# Allegro board usm-p2.brd
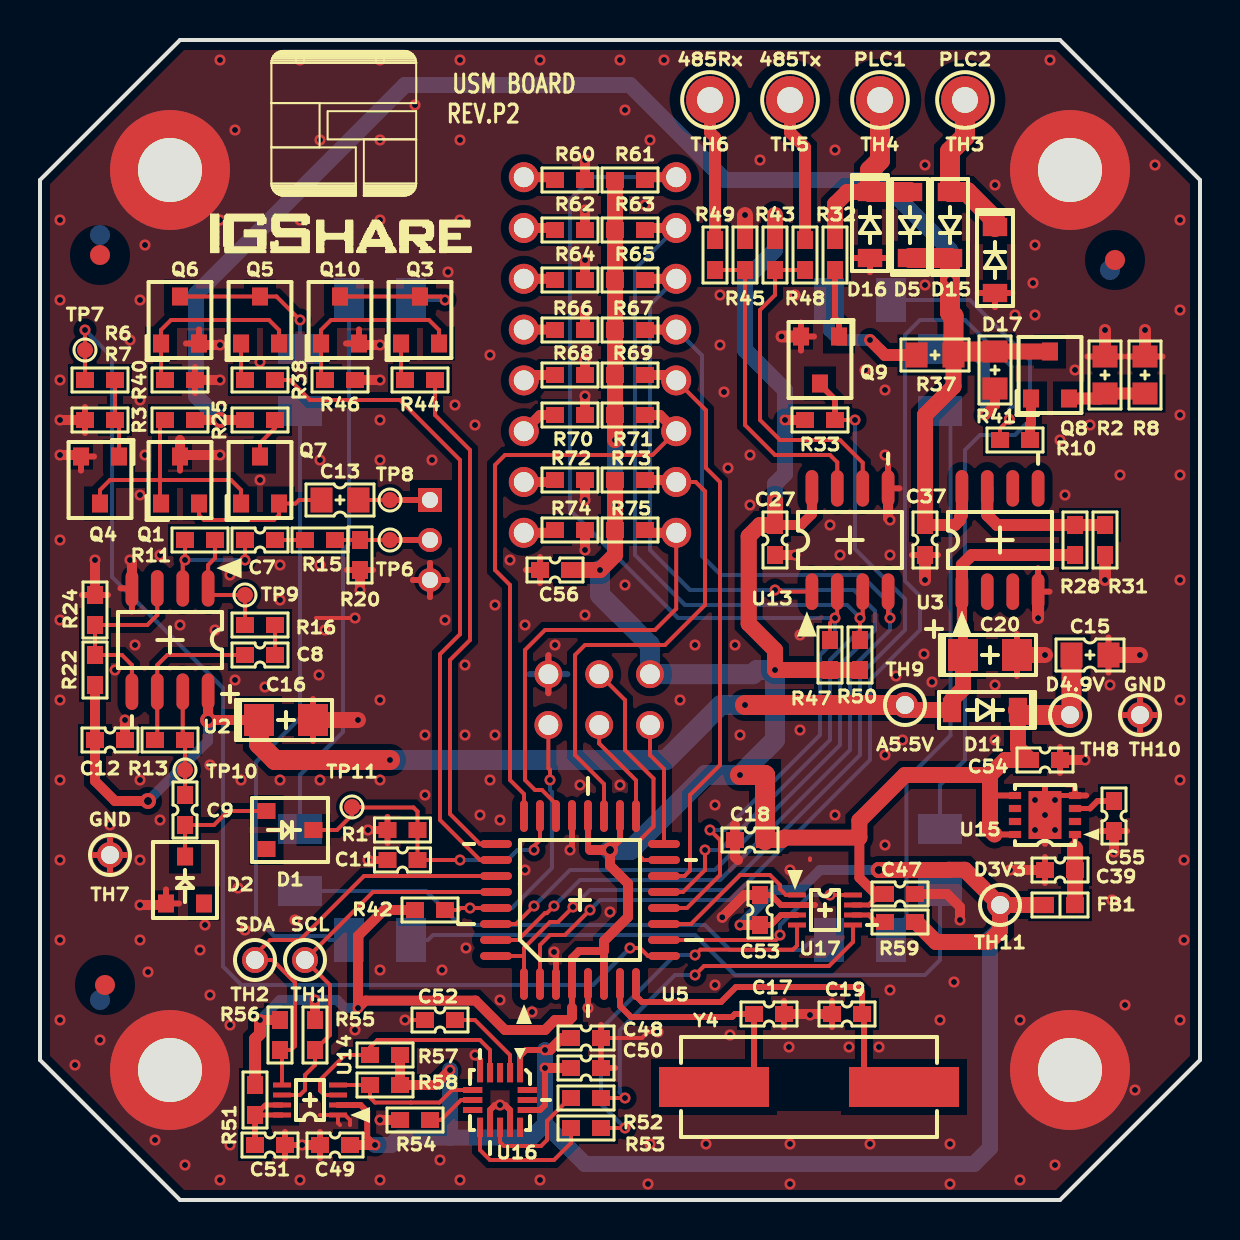
[diagram p0: board, top side]
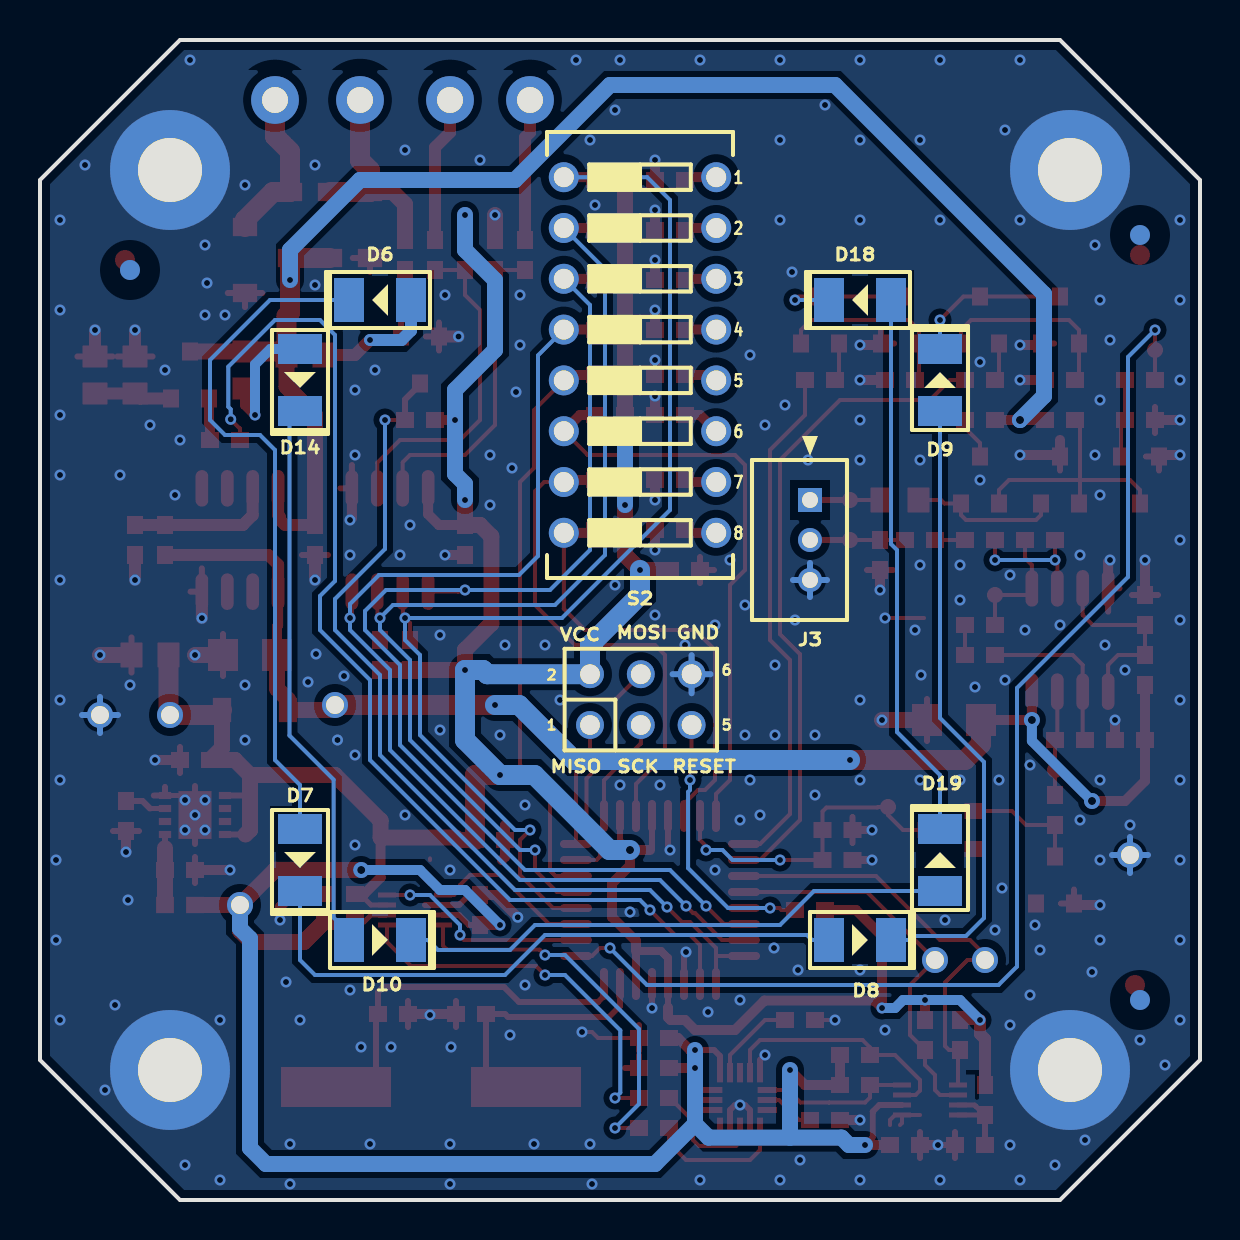
[diagram p1: board, bottom side, seen from below]

Outline 58 x 58 mm; copper layers: TOP, BOTTOM. Coordinates in mm from the lower left corner of the outline.
Outline path: 0,51 7,58 51,58 58,51 58,7 51,0 7,0 0,7 0,51

## Placement (name value [footprint] x y rotation side)
C7  200pF  [CC1608]  11 33 0 top
C8  680pF  [CC1608]  11 27.25 0 top
C9  1nF  [CC1608]  7.25 19.5 90 top
C11  560pF  [CC1608]  18.12 17 0 top
C12  100nF  [CC1608]  3.5 23 180 top
C13  47nF  [CC2012]  15 35 180 top
C15  2.2uF  [CC2012]  52.5 27.25 180 top
C16  TCSCS1C685MAAR  [TC3216]  12.3 24 0 top
C17  15pF  [CC1608]  36.45 9.3 0 top
C18  100nF  [CC1608]  35.5 18 0 top
C19  15pF  [CC1608]  40.35 9.3 180 top
C20  TCSCS1C685MAAR  [TC3216]  47.5 27.25 0 top
C27  100nF  [CC1608]  36.75 33 90 top
C37  680nF  [CC1608]  44.25 33 90 top
C39  2.2uF  [CC1608]  51 16.5 180 top
C47  100nF  [CC1608]  43 15.3 0 top
C48  100nF  [CC1608]  27.3 8.1 0 top
C49  100nF  [CC1608]  14.75 2.75 180 top
C50  4.7uF  [CC1608]  27.3 6.6 0 top
C51  2.2uF  [CC1608]  11.5 2.75 0 top
C52  100nF  [CC1608]  20 9 180 top
C53  100nF  [CC1608]  36 14.5 90 top
C54  100nF  [CC1608]  50.25 22 0 top
C55  100nF  [CC1608]  53.7 19.2 270 top
C56  100nF  [CC1608]  25.75 31.5 0 top
D1  -  [BAT54]  12.5 18.5 270 top
D2  -  [BAT54]  7.25 16 0 top
D5  MMSD4148T1G  [SOD-123]  43.5 48.75 270 top
D6  JSL_3528URC  [JSL-3528_ALT]  41 45 0 bottom
D7  JSL_3528URC  [JSL-3528_ALT]  45 17 270 bottom
D8  JSL_3528URC  [JSL-3528_ALT]  17 13 180 bottom
D9  JSL_3528URC  [JSL-3528_ALT]  13 41 90 bottom
D10  JSL_3528PGC  [JSL-3528_ALT]  41 13 180 bottom
D11  MMSD4148T1G  [SOD-123]  47.25 24.5 0 top
D14  JSL_3528PGC  [JSL-3528_ALT]  45 41 270 bottom
D15  MMSD4148T1G  [SOD-123]  45.5 48.75 270 top
D16  MMSD4148T1G  [SOD-123]  41.5 48.75 90 top
D17  MMSD4148T1G  [SOD-123]  47.75 47 90 top
D18  JSL_3528PGC  [JSL-3528_ALT]  17 45 0 bottom
D19  JSL_3528PGC  [JSL-3528_ALT]  13 17 90 bottom
FB1  BLM18HE152SN1  [BEAD1608]  51 14.75 180 top
H1  PCB_HOLE  [HOLE3_2]  6.5 51.5 0 top
H2  PCB_HOLE  [HOLE3_2]  51.5 51.5 0 top
H3  PCB_HOLE  [HOLE3_2]  6.5 6.5 0 top
H4  PCB_HOLE  [HOLE3_2]  51.5 6.5 0 top
J2  2.54mm_Header_2*3  [HEADER2X3_2_54MM]  30.5 23.75 180 bottom
J3  -  [A2001-WV03]  19.5 33 90 bottom
NOREF  -  []  80.6 -2.2 0 top
NOREF#2  -  []  0 0 0 top
NOREF#3  -  [unnamed#2]  53.75 47 0 top
NOREF#4  -  []  72 -25.8 0 top
NOREF#5  -  []  0 7 0 top
NOREF#6  -  []  7 0 90 top
NOREF#7  -  [unnamed#2]  3.25 10.75 0 top
NOREF#8  -  [unnamed#2]  3 47.25 0 top
NOREF#9  -  [unnamed#2]  3 48.25 180 bottom
NOREF#10  -  [unnamed#2]  3 10 180 bottom
NOREF#11  -  [unnamed#2]  53.5 46.5 180 bottom
Q1  MMBT3906  [SOT23]  7 36 0 top
Q3  MMBT3904  [SOT23]  19 44 0 top
Q4  MMBT3904  [SOT23]  3 36 180 top
Q5  MMBT3904  [SOT23]  11 44 0 top
Q6  MMBT3904  [SOT23]  7 44 0 top
Q7  MMBT3904  [SOT23]  11 36 0 top
Q8  BCV27  [SOT23]  50.5 41.25 0 top
Q9  MMBT3904  [SOT23]  39 42 180 top
Q10  MMBT3904  [SOT23]  15 44 0 top
R1  510K  [RC1608]  18.12 18.5 0 top
R2  15  [RC2012]  53.25 41.25 270 top
R3  47K  [RC1608]  7 39 0 top
R6  10K  [RC1608]  3 41 0 top
R7  10K  [RC1608]  3 39 0 top
R8  15  [RC2012]  55.25 41.25 270 top
R10  1K  [RC1608]  48.75 38 180 top
R11  1M  [RC1608]  8 33 0 top
R13  1M  [RC1608]  6.5 23 0 top
R15  10K  [RC1608]  14 33 180 top
R16  10K  [RC1608]  11 28.75 0 top
R20  100K  [RC1608]  16 32.25 90 top
R22  10K  [RC1608]  2.75 26.5 90 top
R24  10K  [RC1608]  2.75 29.5 270 top
R25  200  [RC1608]  11 39 180 top
R28  360K  [RC1608]  51.75 33 270 top
R31  100K  [RC1608]  53.25 33 90 top
R32  100K  [RC1608]  39.75 47.25 270 top
R33  47K  [RC1608]  39 39 180 top
R37  1K  [RC2012]  44.75 42.25 0 top
R38  2.7K  [RC1608]  11 41 180 top
R40  3K  [RC1608]  7 41 180 top
R41  1K  [RC2012]  47.75 41.5 90 top
R42  10K  [RC1608]  19.5 14.5 180 top
R43  4.7K  [RC1608]  36.75 47.25 90 top
R44  2.7K  [RC1608]  19 41 180 top
R45  4.7K  [RC1608]  35.25 47.25 270 top
R46  3K  [RC1608]  15 41 180 top
R47  4.7K  [RC1608]  39.5 27.25 270 top
R48  10  [RC1608]  38.25 47.25 270 top
R49  10  [RC1608]  33.75 47.25 270 top
R50  4.7K  [RC1608]  41 27.25 270 top
R51  200K  [RC1608]  10.75 5 90 top
R52  0  [RC1608]  27.3 5.1 180 top
R53  0  [RC1608]  27.3 3.6 180 top
R54  4.7K  [RC1608]  18.75 4 0 top
R55  4.7K  [RC1608]  13.75 8.25 90 top
R56  4.7K  [RC1608]  12 8.25 90 top
R57  4.7K  [RC1608]  17.25 7.25 0 top
R58  4.7K  [RC1608]  17.25 5.75 0 top
R59  4.7K  [RC1608]  43 13.9 0 top
R60  1K  [RC1608]  26.5 51 180 top
R61  4.7K  [RC1608]  29.5 51 180 top
R62  1K  [RC1608]  26.5 48.5 180 top
R63  4.7K  [RC1608]  29.5 48.5 180 top
R64  1K  [RC1608]  26.5 46 180 top
R65  4.7K  [RC1608]  29.5 46 180 top
R66  1K  [RC1608]  26.5 43.5 180 top
R67  4.7K  [RC1608]  29.5 43.5 180 top
R68  1K  [RC1608]  26.5 41.25 180 top
R69  4.7K  [RC1608]  29.5 41.25 180 top
R70  1K  [RC1608]  26.5 39.25 180 top
R71  4.7K  [RC1608]  29.5 39.25 180 top
R72  1K  [RC1608]  26.5 36 180 top
R73  4.7K  [RC1608]  29.5 36 180 top
R74  1K  [RC1608]  26.5 33.5 180 top
R75  4.7K  [RC1608]  29.5 33.5 180 top
S2  -  [LL1051-1-8]  28 42.25 270 bottom
TH1  TH  [1PIN-HDR]  13.25 12 0 top
TH2  TH  [1PIN-HDR]  10.75 12 0 top
TH3  1.3mm  [TP_51]  46.25 55 0 top
TH4  1.3mm  [TP_51]  42 55 0 top
TH5  1.3MM  [TP_51]  37.5 55 0 top
TH6  1.3mm  [TP_51]  33.5 55 0 top
TH7  GND  [1PIN-HDR]  3.5 17.25 0 top
TH8  D4.9V  [1PIN-HDR]  51.5 24.25 0 top
TH9  A5.5V  [1PIN-HDR]  43.25 24.75 0 top
TH10  GND  [1PIN-HDR]  55 24.25 0 top
TH11  D3V3P  [1PIN-HDR]  48 14.75 0 top
TP6  B+  [TP]  17.5 33 0 top
TP7  B+  [TP]  2.25 42.5 0 top
TP8  B+  [TP]  17.5 35 0 top
TP9  B+  [TP]  10.25 30.25 0 top
TP10  B+  [TP]  7.25 21.5 0 top
TP11  B+  [TP]  15.6 19.65 0 top
U2  TL072ID  [SOP8_3_9_6_1_27]  6.5 28 180 top
U3  LP2951D  [SOP8_3_9_6_1_27]  48 33 0 top
U5  ATMEGA48V-10AU  [QFP32_7_9_0_8]  27 15 90 top
U13  SN65176BD/DNI  [SOP8_3_9_6_1_27]  40.5 33 0 top
U14  PCA9306  [TSSOP8_2_3_3_1_0_5]  13.5 5 90 top
U15  TPS73533QDRBRQ1  [QFN8_3_0_65]  50.25 19.25 90 top
U16  MMA8451Q  [QFN16_3_0_5]  23 5 270 top
U17  TXS0102-Q1  [TSSOP8_2_3_3_1_0_5]  39.25 14.5 270 top
Y4  SX-1(8MHz)  [SX-1]  38.45 5.65 0 top

## Library data of the parts
C7-C9 C11 C12 C17-C19 C27 C37 C39 C47-C56 = _CC1608
C13 C15 = _CC2012
C16 C20 = _TC3216
D1 D2 = _BAT54
D5 D11 D15-D17 = _SOD-123
D6-D10 D14 D18 D19 = _JSL-3528_ALT
FB1 = _BEAD1608
H1-H4 = _HOLE3_2
J2 = _HEADER2X3_2_54MM
J3 = _A2001-WV03
Q1 Q3-Q10 = _SOT23
R1 R3 R6 R7 R10 R11 R13 R15 R16 R20 R22 R24 R25 R28 R31-R33 R38 R40 R42-R75 = _RC1608
R2 R8 R37 R41 = _RC2012
S2 = _LL1051-1-8
TH1 TH2 TH7-TH11 = _1PIN-HDR
TH3-TH6 = _TP_51
TP6-TP11 = _TP
U2 U3 U13 = _SOP8_3_9_6_1_27
U5 = _QFP32_7_9_0_8
U14 U17 = _TSSOP8_2_3_3_1_0_5
U15 = _QFN8_3_0_65
U16 = _QFN16_3_0_5
Y4 = _SX-1

## Footprints (pads in the part's own frame, mm; a bottom-side part is the same pattern mirrored in y, then rotated)
1PIN-HDR
  round 1.3 hole 0.9: 1(0,0)
A2001-WV03
  rect 1.2x1.2 hole 0.8: 1(2,0)
  round 1.2 hole 0.8: 2(0,0) 3(-2,0)
BAT54
  rect 0.8x0.9 smd: 1(0,1.175) 2(-0.95,-1.175) 3(0.95,-1.175)
BEAD1608
  rect 0.889x0.813 smd: 1(-0.75,0) 2(0.75,0)
CC1608
  rect 0.9x0.8 smd: 1(-0.75,0) 2(0.75,0)
CC2012
  rect 1.1x1.25 smd: 1(-0.925,0) 2(0.925,0)
HEADER2X3_2_54MM
  round 1.397 hole 0.991: 1(0,0) 2(0,2.54) 3(2.54,0) 4(2.54,2.54) 5(5.08,0) 6(5.08,2.54)
HOLE3_2
  round 5.994 hole 3.2: 1(0,0)
JSL-3528_ALT
  rect 1.5x2.2 smd: 1(-1.55,0) 2(1.55,0)
LL1051-1-8
  round 1.499 hole 1: 1(-8.89,3.81) 2(-6.35,3.81) 3(-3.81,3.81) 4(-1.27,3.81) 5(1.27,3.81) 6(3.81,3.81) 7(6.35,3.81) 8(8.89,3.81) 9(8.89,-3.81) 10(6.35,-3.81) 11(3.81,-3.81) 12(1.27,-3.81) 13(-1.27,-3.81) 14(-3.81,-3.81) 15(-6.35,-3.81) 16(-8.89,-3.81)
QFN8_3_0_65
  rect 0.356x0.61 smd: 1(-0.975,-1.5) 2(-0.325,-1.5) 3(0.325,-1.5) 4(0.975,-1.5) 5(0.975,1.5) 6(0.325,1.5) 7(-0.325,1.5) 8(-0.975,1.5)
  rect 2.388x1.651 smd: 9(0,0)
QFN16_3_0_5
  rect 0.967x0.3 smd: 1(-1.367,1) 2(-1.367,0.5) 3(-1.367,0) 4(-1.367,-0.5) 5(-1.367,-1) 9(1.367,-1) 10(1.367,-0.5) 11(1.367,0) 12(1.367,0.5) 13(1.367,1)
  rect 0.3x0.967 smd: 6(-0.5,-1.367) 7(0,-1.367) 8(0.5,-1.367) 14(0.5,1.367) 15(0,1.367) 16(-0.5,1.367)
QFP32_7_9_0_8
  oval 1.6x0.4 smd: 1(-4.2,2.8) 2(-4.2,2) 3(-4.2,1.2) 4(-4.2,0.4) 5(-4.2,-0.4) 6(-4.2,-1.2) 7(-4.2,-2) 8(-4.2,-2.8) 17(4.2,-2.8) 18(4.2,-2) 19(4.2,-1.2) 20(4.2,-0.4) 21(4.2,0.4) 22(4.2,1.2) 23(4.2,2) 24(4.2,2.8)
  oval 0.4x1.6 smd: 9(-2.8,-4.2) 10(-2,-4.2) 11(-1.2,-4.2) 12(-0.4,-4.2) 13(0.4,-4.2) 14(1.2,-4.2) 15(2,-4.2) 16(2.8,-4.2) 25(2.8,4.2) 26(2,4.2) 27(1.2,4.2) 28(0.4,4.2) 29(-0.4,4.2) 30(-1.2,4.2) 31(-2,4.2) 32(-2.8,4.2)
RC1608
  rect 0.9x0.8 smd: 1(-0.75,0) 2(0.75,0)
RC2012
  rect 1.1x1.25 smd: 1(-0.925,0) 2(0.925,0)
SOD-123
  rect 0.91x1.22 smd: 1(1.65,0) 2(-1.65,0)
SOP8_3_9_6_1_27
  oval 0.635x1.829 smd: 1(-1.905,-2.583) 2(-0.635,-2.583) 3(0.635,-2.583) 4(1.905,-2.583) 5(1.905,2.583) 6(0.635,2.583) 7(-0.635,2.583) 8(-1.905,2.583)
SOT23
  rect 0.8x0.9 smd: 1(-0.95,-1.175) 2(0.95,-1.175) 3(0,1.175)
SX-1
  rect 5.5x2 smd: 1(-4.75,0) 2(4.75,0)
TC3216
  rect 1.5x1.6 smd: 1(-1.35,0) 2(1.35,0)
TP
  round 0.8 smd: 1(0,0)
TP_51
  round 2.388 hole 1.295: 1(0,0)
TSSOP8_2_3_3_1_0_5
  rect 0.25x0.9 smd: 1(-0.75,-1.4) 2(-0.25,-1.4) 3(0.25,-1.4) 4(0.75,-1.4) 5(0.75,1.4) 6(0.25,1.4) 7(-0.25,1.4) 8(-0.75,1.4)
unnamed#2
  round 1 smd: (0,0)

## Nets
A5.5V: C12.2 C16.1 C20.1 D11.2 R22.1 R28.2 TH9.1 U2.8 U3.1
A24V: C37.2 D5.1 D15.1 Q8.3 R3.2 R25.2 R37.2 R41.2 U3.8
D3V3P: C48.1 C49.1 C50.1 C53.1 FB1.2 R57.2 R58.2 R59.2 TH11.1 U14.2 U16.1 U16.14 U17.3
D4.9V: C15.2 C18.2 C27.2 C47.1 C54.1 C56.2 D11.1 J2.2 R33.2 R42.2 R43.2 R47.2 R50.2 R51.2 R55.2 R56.2 R61.2 R63.2 R65.2 R67.2 R69.2 R71.2 R73.2 R75.2 TH8.1 U5.4 U5.6 U5.18 U5.20 U13.8 U15.5 U15.8 U17.7
GND: C11.1 C12.1 C15.1 C16.2 C17.2 C18.1 C19.2 C20.2 C27.1 C37.1 C39.2 C47.2 C48.2 C49.2 C50.2 C51.2 C52.2 C53.2 C54.2 C55.2 C56.1 D2.2 D16.2 D17.2 H1.1 H2.1 H3.1 H4.1 J2.6 J3.3 Q1.3 Q4.2 Q6.2 Q9.2 Q10.2 R1.1 R2.1 R7.1 R8.1 R20.1 R24.1 R31.1 R40.1 R45.1 R46.1 R54.1 R60.1 R62.1 R64.1 R66.1 R68.1 R70.1 R72.1 R74.1 TH7.1 TH10.1 U2.4 U3.4 U5.3 U5.5 U5.21 U13.5 U14.1 U15.4 U15.9 U16.5 U16.10 U16.12 U17.2
485_DE_EN: R50.1 R63.1 S2.15 U5.13 U13.3
485_RE_EN: R47.1 R61.1 S2.16 U5.12 U13.2
485_RX: R49.1 TH6.1
485_RXD: R65.1 S2.14 U5.30 U13.1
485_TX: R48.1 TH5.1
485_TXD: R67.1 S2.13 U5.31 U13.4
I2C_SCL: R55.1 TH1.1 U5.28 U14.6
I2C_SDA: R56.1 TH2.1 U5.27 U14.5
INT1: R52.1 U17.5
INT1_M: U5.10 U17.8
INT2: R53.1 U17.4
INT2_M: U5.11 U17.1
LED_GREEN: R44.1 U5.25
LED_RED: R38.1 U5.26
PLC1: D5.2 D16.1 R32.1 TH4.1
PLC2: D15.2 D17.1 TH3.1
PLC_RX: Q9.3 R33.1 U5.1 U5.32
PLC_TX: R10.2 U5.2
RESET: J2.5 R42.1 U5.29
RX_ADC: C11.2 D1.1 R1.2 TP11.1 U5.23
RX_IN: J3.2 R15.1 R20.2 TP6.1
SCL: R57.1 U14.3 U16.4
SDA: R58.1 U14.4 U16.6
SELECT: R75.1 S2.9 U5.22
TX_OUT: C13.1 J3.1 TP8.1
TX_TRIG: R6.1 TP7.1 U5.9
USM_ID4: R69.1 S2.12 U5.14
USM_ID5: R71.1 S2.11 U5.24
USM_ID6: R73.1 S2.10 U5.19
N00306: C55.1 U15.3
N00430: Q8.1 R10.1
N00485: Q8.2 R2.2 R8.2
N00560: C39.1 FB1.1 U15.1
N00808: C51.1 R51.1 U14.7 U14.8
N00882: R28.1 R31.2 U3.7
N16711905: Q9.1 R32.2
N16712688: R43.1 R48.2 U13.6
N16712703: R45.2 R49.2 U13.7
N16713814: J2.3 U5.17
N16714271: C19.1 U5.8 Y4.2
N16714295: C17.1 U5.7 Y4.1
N16714845: J2.1 U5.16
N16714864: J2.4 U5.15
N16717763: R54.2 U16.7
N16718046: R53.2 U16.9
N16718070: R52.2 U16.11
N16718282: C52.1 U16.2
N16724355: R59.1 U17.6
N16729656: R60.2 S2.1
N16729712: R62.2 S2.2
N16729754: R64.2 S2.3
N16729796: R66.2 S2.4
N16732309: R68.2 S2.5
N16732331: R70.2 S2.6
N16732335: R72.2 S2.7
N16732375: R74.2 S2.8
N16777693: Q4.1 R6.2 R7.2
N16777717: Q1.1 Q4.3 Q7.1 R3.1
N16777760: C13.2 Q1.2 Q7.2
N16777979: C7.2 R15.2
N16777981: C7.1 R11.1 U2.2
N16778000: R22.2 R24.2 U2.3 U2.5
N16778063: C8.1 R13.1 U2.6
N16778096: R11.2 R16.1 TP9.1 U2.1
N16778098: C8.2 R16.2
N16778104: C9.2 R13.2 TP10.1 U2.7
N16778216: C9.1 D1.2 D2.1
N16779077: D9.2 Q5.3 Q6.3
N16779095: Q5.2 Q6.1 R40.2
N16779267: Q5.1 R38.2
N16779649: D18.2 Q3.3 Q10.3
N16779651: Q3.2 Q10.1 R46.2
N16779692: Q3.1 R44.2
N16779821: D14.1 R41.1
N16779835: D10.1 D14.2
N16779837: D10.2 D19.1
N16779852: D18.1 D19.2
N16779961: D6.1 R37.1
N16779980: D6.2 D7.1
N16779982: D7.2 D8.1
N16779984: D8.2 D9.1
N167777270: Q7.3 R25.1

Pads without a net: D1 3; D2 3; U3 2 3 5 6; U15 2 6 7; U16 3 8 13 15 16

## Via types
v1: diameter 0.55, hole 0.3, TOP to BOTTOM, 296 vias
v2: diameter 0.8, hole 0.4, TOP to BOTTOM, 5 vias

## Routing (per net, layer and track width the routed paths; a pad name or vN(x,y) marks a point on that pad's centre or on a via; arc(x,y) is an arc through that point)
A5.5V: length 67.9
  TOP w0.5: U2.8 v2(8.4,24) C16.1 ; R22.1 C12.2 2.75,20.95 3.75,19.95 v2(5.4,19.95) ; U3.1 46.09,28.73 46.15,28.68 C20.1
  TOP w0.6: R28.2 46.59,32.25 46.09,31.76 U3.1
  TOP w0.8: TH9.1 43.5,24.5 D11.2 45.6,25.02 46.15,25.57 C20.1
  TOP w1: TH9.1 v1(35.25,24.75) ; v1(17.5,22) 11.75,22 10.95,22.8 C16.1
  BOTTOM w0.5: v2(5.4,19.95) 8.4,22.95 v2(8.4,24)
  BOTTOM w1: v1(17.5,22) 31.3,22 34.05,24.75 v1(35.25,24.75)
A24V: length 80.6
  TOP w0.5: R3.2 v2(9,39) R25.2
  TOP w0.6: C37.2 45.75,33.75 46,34 46,34.15 46.09,34.24 U3.8
  TOP w0.8: R37.2 45.67,40.67 44.25,39.25 C37.2 ; Q8.3 R41.2
  TOP w1: D5.1 D15.1 v1(45.5,46) 45.5,44.37 45.67,44.19 R37.2 45.85,42.42 R41.2
  BOTTOM w0.8: v1(45.5,46) 45.5,47.5 42,51 34.25,51 29.5,55.75 18.25,55.75 7.8,45.3 7.8,40.2 v2(9,39)
D3V3P: length 95
  TOP w0.3: v1(25.25,7.5) 24.3,7.5 24,7.2 U16.1 ; U14.2 16.03,4.75 16.36,4.42 16.36,3.14 v1(16.75,2.75) ; v1(25.25,6.6) 25.25,4.75 25,4.5 U16.14 ; C53.1 36.55,13.75 37.05,14.25 U17.3
  TOP w0.5: R57.2 R58.2 19.75,5.75 v1(20.5,6.5) ; C48.1 26.1,8.1 25.5,7.5 v1(25.25,7.5) ; C50.1 v1(25.25,6.6) ; v1(35,13.75) C53.1 ; v1(16.75,2.75) C49.1
  TOP w0.8: v2(41.94,16.5) 45.43,16.5 45.44,16.51 46.24,16.51 TH11.1 ; TH11.1 48,13.46 47.44,12.9 44.8,12.9 43.8,13.9 R59.2 ; TH11.1 FB1.2
  BOTTOM w0.5: v1(35,13.75) 36.75,15.5 38,15.5 39,16.5 v2(41.94,16.5)
  BOTTOM w0.8: 25.25,3.8 24.57,3.12 20.5,3.12 ; 25.25,3.8 27.25,1.8 46.7,1.8 47.5,2.6 47.5,13.07 48,13.57 TH11.1 ; 25.25,3.8 v1(25.25,6.6) v1(25.25,7.5) ; v1(16.75,2.75) 17.55,2.75 17.92,3.12 20.5,3.12 ; 20.5,3.12 v1(20.5,6.5)
D4.9V: length 170.4
  TOP w0.25: 42,15.3 41.45,14.75 U17.7
  TOP w0.3: U5.18 29,18 v2(28.5,17.5) ; U15.8 47.73,18.27 ; U15.5 47.52,20.23 47.5,20.25 ; 26.6,9.62 U5.4 ; 27.5,17.5 27.4,17.6 U5.20
  TOP w0.4: U5.6 28.2,12.45 26.95,12.45 26.6,12.1 U5.4
  TOP w0.5: R33.2 v1(37.25,39) ; U13.8 38.59,34.29 38.05,33.75 C27.2 ; 27.5,17.5 v2(28.5,17.5) 28.5,16.72 29.4,15.82 29.4,14.15 28.2,12.95 28.2,12.45 ; R55.2 v1(13.75,10) ; R56.2 v1(11,9) ; 26.6,9.62 26.6,9.13 26.47,9 25.75,9 25.25,8.5 23.25,8.5 21.78,9.97 16.27,9.97 v1(15.9,9.6) 15.9,13.2 17.2,14.5 R42.2 ; C47.1 41.79,15.3 40.97,16.12 40.97,18.12
  TOP w0.6: v1(11,9) 11,8.3 10.75,8.05 R51.2
  TOP w0.8: 47.73,18.27 47.5,18.5 47.5,21.25 ; C18.2 37.1,18 37.22,18.12 40.97,18.12 40.97,18.97 43.25,21.25 47.5,21.25 ; R50.2 R47.2 v1(36.75,26.5) 36.75,27.5 35.43,28.82 35.43,33.18 36,33.75 C27.2 v1(36.75,35) ; D11.1 48.9,22.6 C54.1 48.25,22 47.5,21.25 ; v1(28.75,38) R71.2 R69.2 R67.2 R65.2 R63.2 R61.2 ; R73.2 v1(28.75,34.75) R75.2 28.75,32.25 v1(28,31.5) C56.2 ; R43.2 v1(36.75,49.25)
  TOP w1: C18.2 36.25,21.25 v1(35,21.25) ; C15.2 51.58,24.57 TH8.1 49.15,24.25 D11.1
  BOTTOM w0.5: v1(15.9,9.6) 15.25,9.6 14.85,10 v1(13.75,10) 12,10 v1(11,9)
  BOTTOM w0.8: v1(28.75,34.75) v1(28.75,38) ; v1(36.75,49.25) 36.75,47.5 35.25,46 35.25,42.5 37.25,40.5 v1(37.25,39) 37.25,36.3 36.75,35.8 v1(36.75,35)
  BOTTOM w1: v1(28,31.5) 28,30.25 30.5,27.75 J2.2 35.64,26.29 35.85,26.5 v1(36.75,26.5) 36.75,23 v1(35,21.25) 33.28,21.25 29.53,17.5 v2(28.5,17.5)
GND: length 163.4
  TOP w0.2: v1(30.9,8.4) 30.4,8.4 30.1,8.1 C48.2 ; 13.8,29.1 v1(15.75,29.1) ; U14.1 14,4.25 ; U14.1 14.9,3.85 15,3.75 ; U14.1 15.25,4.25 15.5,4 15.5,3.75 ; 38.5,17.08 38.5,17 ; C52.2 v1(18.25,9)
  TOP w0.25: U15.4 50.98,20.23 v1(50.75,20)
  TOP w0.3: U5.21 26.6,17.6 v1(26.5,17.5) ; C51.2 12.95,2.75 ; C51.2 12.25,2.1 ; C51.2 12.25,3.4 ; 41.5,46.39 D16.2 ; D16.2 40.64,47.1 ; D16.2 42.36,47.1 ; 7.3,42.83 Q6.2 ; Q6.2 7.95,43.53 ; Q6.2 8.6,42.83 ; 54.35,18.45 C55.2 53.05,18.45 ; 28.05,8.75 C48.2 28.05,7.45 ; Q4.2 2.7,37.17 ; Q4.2 1.4,37.17 ; Q4.2 2.05,36.47 ; 3.5,16.35 TH7.1 ; TH7.1 4.4,17.25 ; TH7.1 2.6,17.25 ; TH7.1 3.5,18.15 ; 13.65,22.95 C16.2 13.65,25.05 ; 38.05,42.47 Q9.2 ; Q9.2 38.05,43.88 ; Q9.2 38.7,43.17 ; 51,22.65 C54.2 51,21.35 ; 51.75,20.65 U15.4 52.31,20.23 ; C53.2 36.55,15.25 37.05,14.75 U17.2 38.75,14.75 ; 54.37,42.17 R8.1 56.13,42.17 ; 18.65,31 J3.3 ; J3.3 20.35,31 ; J3.3 19.5,30.15 ; J3.3 19.5,31.85 ; 7,36.47 Q1.3 7.65,37.17 ; 15.35,31.5 R20.1 16.65,31.5 ; 4.59,29.42 U2.4 4.03,30.58 ; 54.13,42.17 R2.1 52.37,42.17 ; C56.1 25,32.15 ; C56.1 24.3,31.5 ; C56.1 25,30.85 ; 2.1,30.25 R24.1 3.4,30.25 ; D17.2 48.61,45.35 ; D17.2 46.89,45.35 ; D17.2 47.75,44.64 ; Q10.2 15.95,43.53 ; Q10.2 16.6,42.83 ; Q10.2 15.3,42.83 ; 28.75,6.6 C50.2 28.05,7.25 ; D2.2 6.3,15.53 ; D2.2 6.95,14.82 ; D2.2 5.65,14.82 ; 37.2,8.65 C17.2 37.2,9.95 ; U16.5 22,7 v1(21.75,7.25) ; 50.25,17.15 C39.2 50.25,15.85 ; 50.47,30.42 U3.4 49.91,31.58 ; 44.9,32.25 C37.1 43.6,32.25 ; 2.25,38.35 R7.1 2.25,39.65 ; 42.97,35.58 U13.5 42.41,36.75 ; 14,3.4 C49.2 14,2.1 ; 17.38,17.85 R1.1 17.38,19.15 ; 55,23.35 TH10.1 ; TH10.1 55.9,24.25 ; TH10.1 54.1,24.25 ; TH10.1 55,25.15 ; 53.42,26.37 C15.1 53.42,28.13 ; 7.75,40.35 R40.1 7.75,41.65 ; 25.42,25.34 J2.6 25.42,27.24 ; v1(25.7,12.4) 25.7,12.3 25.8,12.2 U5.3 ; 48.85,28.3 C20.2 48.85,26.2 ; U5.5 v1(27.4,9.6) ; 50.25,20.69 v1(50.25,19.25) 50.25,17.81 ; U16.10 22.5,4.5 22.75,4.75 v1(23,4.75) 23.25,4.75 23.5,4.5 U16.12 ; 39.6,9.95 C19.2 39.6,8.65
  TOP w0.4: C11.1 v1(16.4,17) ; R1.1 v1(16.4,18.5)
  TOP w0.5: Q10.2 15.95,42.75 v1(17,42.75) ; R74.1 v1(27.25,32.5) ; R46.1 v1(17,41) ; v1(16,30.5) R20.1 ; D2.2 6.3,14.75 v1(5,14.75) ; R62.1 v1(27.25,49.5) ; C19.2 38.55,9.3 v1(38.5,9.25) 38.45,9.3 C17.2 ; v1(46,14) 46,14.65 45.35,15.3 C47.2 ; v1(27.25,44.5) R66.1 ; U13.5 42.41,34.09 v1(42.5,34) ; C12.1 v1(4.25,24) ; C53.2 35.23,15.25 v1(34.11,14.14) ; v1(53.7,17.4) C55.2 ; v1(27.25,47) R64.1 ; Q6.2 7.95,42.75 v1(9,42.75) ; 34.9,17 34.75,17.15 C18.1 34.75,18.75 ; R54.1 v1(17,4) ; 7,38 7,37.25 ; 7,37.25 Q1.3 ; 7,37.25 v1(9,37.25) ; v1(13.1,2.75) C49.2 ; R60.1 v1(27.25,52) ; v1(9,41) R40.1 ; v1(1,37.25) 2.05,37.25 Q4.2 ; R7.1 v1(1,39) ; C39.2 v1(48.5,16.5) ; C54.2 v1(52.25,22) ; R72.1 v1(27.25,35) ; v1(4.5,32) 4.59,31.91 U2.4 ; v1(27.25,40.2) R70.1 ; C27.1 v1(37.75,32.25) ; R24.1 v1(2.75,32) ; v1(27.25,42) R68.1
  TOP w0.6: R8.1 v1(55.25,43.5) ; R2.1 v1(53.25,43.5) ; C37.1 v1(44.25,31) ; U3.4 v1(49.91,29.09) ; R31.1 v1(53.25,31) ; Q9.2 v1(37.08,43.17)
  TOP w0.8: C20.2 v1(50.25,27.25) ; C16.2 v1(15.9,24) ; C15.1 v1(55,27.25) ; R45.1 v1(35.25,49.25)
  BOTTOM w0.3: TH7.1 4.4,17.25 ; TH7.1 2.6,17.25 ; TH7.1 3.5,16.35 ; TH7.1 3.5,18.15 ; 18.65,31 J3.3 ; J3.3 20.35,31 ; J3.3 19.5,30.15 ; J3.3 19.5,31.85 ; J2.6 25.42,27.24 ; J2.6 26.37,26.29 ; J2.6 24.47,26.29 ; J2.6 25.42,25.34 ; TH10.1 55,25.15 ; TH10.1 54.1,24.25 ; TH10.1 55.9,24.25 ; TH10.1 55,23.35
  vias: v1(1,49) v1(1,45) v1(1,41) v1(1,33) v1(1,29) v1(1,25) v1(1,21) v1(1,17) v1(1,13) v1(1,9) v1(1.75,6.75) v1(3,8) v1(3.5,18.75) v1(3.75,26.5) v1(4.5,43) v1(4.75,27.75) v1(5,45) v1(5,40) v1(5,35.25) v1(5,21) v1(5,17) v1(5,13) v1(5.25,47.75) v1(5.25,37.25) v1(5.4,11.4) v1(5.75,3) v1(6,32.25) v1(6,19) v1(7,28.75) v1(7.25,1.75) v1(8,12.5) v1(8.25,13.75) v1(8.5,21.75) v1(8.5,10.25) v1(8.75,28.5) v1(9,57) v1(9,49) v1(9,1) v1(9.5,31.25) v1(9.5,8.75) v1(9.5,2.75) v1(9.75,53.5) v1(9.75,26) v1(9.9,15.6) v1(10.05,21) v1(10.25,13.5) v1(11,41.9) v1(11,36) v1(11.25,25.65) v1(12,31.75) v1(12,30) v1(12,21) v1(12.75,14) v1(13,57) v1(13,49) v1(13,1) v1(13.95,26.25) v1(14,53) v1(14,37) v1(14,31.75) v1(14,21) v1(14.25,28.5) v1(15.75,8.5) v1(17,57) v1(17,53) v1(17,49) v1(17,39) v1(17,37) v1(17,25) v1(17,21) v1(17,11.5) v1(17,1) v1(18.75,54.75) v1(19.25,23.25) v1(19.25,20.25) v1(19.6,37) v1(20,2) v1(20.1,11.5) v1(20.25,29) v1(20.4,46.4) v1(20.75,39.75) v1(21,57) v1(21,53) v1(21,49) v1(21,1) v1(21.25,26.75) v1(21.25,23.25) v1(21.3,12.6) v1(21.75,38.75) v1(22,19.25) v1(22.5,42.25) v1(22.5,21) v1(22.75,29.75) v1(22.75,23.25) v1(23,19) v1(23,10) v1(23.5,32) v1(24.25,28.75) v1(24.25,16.5) v1(24.6,9.4) v1(25,57) v1(25,1) v1(25.75,27.75) v1(27,20.75) v1(27.25,29.25) v1(28.5,14.4) v1(29,57) v1(29,20.75) v1(29.25,54.5) v1(29.25,30.75) v1(30.25,49.75) v1(30.4,0.8) v1(30.5,53) v1(30.5,2.8) v1(31.2,57) v1(32,25) v1(32.75,27.75) v1(33.3,2.8) v1(33.75,19.75) v1(33.75,10.75) v1(34,45.25) v1(34,42.75) v1(34.2,40.4) v1(34.4,36.6) v1(34.5,8.25) v1(34.75,27.75) v1(35,23.25) v1(35.5,37.25) v1(35.5,34.75) v1(36,52) v1(37.5,16.5) v1(37.45,7.65) v1(37.5,2.8) v1(37.5,0.8) v1(37.75,45.25) v1(38,28.25) v1(38,23.5) v1(39.5,33.75) v1(39.75,52.5) v1(39.75,19.25) v1(40,32.25) v1(40.45,7.65) v1(41.25,41.5) v1(41.5,2.8) v1(41.95,7.65) v1(42.25,40.5) v1(42.25,37.25) v1(42.25,22.25) v1(42.25,17.75) v1(42.5,32.25) v1(42.5,10.5) v1(42.8,26.2) v1(43.12,23) v1(44.25,51.75) v1(44.25,45.75) v1(44.2,27.3) v1(44.6,25.9) v1(45,9) v1(45.5,2.8) v1(45.5,0.8) v1(45.7,10.9) v1(47.75,50.75) v1(47.75,25.75) v1(47.75,23) v1(48.75,44.25) v1(49,9) v1(49,1) v1(49.65,45.85) v1(49.75,47.75) v1(49.75,44.25) v1(49.75,20) v1(49.75,18.5) v1(50.5,57) v1(50.75,18.5) v1(50.75,1.75) v1(51,38) v1(51.25,35.25) v1(51.75,41.5) v1(52.5,38.75) v1(53.5,25.75) v1(53.6,15) v1(54,36.25) v1(54.25,9.75) v1(54.75,5.5) v1(55.75,51.75) v1(57,49) v1(57,44.5) v1(57,39.25) v1(57,36.25) v1(57,31) v1(57,25) v1(57,21) v1(57,9) v1(57.2,17) v1(57.2,13)
485_DE_EN: length 52.6
  TOP w0.2: U5.13 32.15,15.4 33.25,16.5 v1(33.25,17.5) ; R50.1 41,29.1 v1(41,29.1) 41.13,29.24 U13.3
  TOP w0.5: R63.1 30.35,48.6 S2.15
  BOTTOM w0.2: v1(33.25,17.5) 34,17.5 39.5,23 39.5,27 41,28.5 v1(41,29.1) 40.35,29.75 32.25,29.75 29.75,32.25 29.75,46.54 S2.15
485_RE_EN: length 60.5
  TOP w0.2: U5.12 32.35,14.6 34,16.25 34,18 v1(33.5,18.5) ; R47.1 39.5,28.85 v1(39.75,29.1) 39.86,29.21 39.86,30.41 U13.2
  TOP w0.5: S2.16 30.39,51.14 R61.1
  BOTTOM w0.2: v1(33.5,18.5) 34.25,18.5 39,23.25 39,27.25 39.75,28 v1(39.75,29.1) 31.9,29.1 26.5,34.5 26.5,50 27.64,51.14 S2.16
485_RX: length 7.1
  TOP w0.6: TH6.1 33.5,53.38 33.75,53.13 R49.1
485_RXD: length 58.4
  TOP w0.2: U13.1 37.08,30.42 37,30.5 v1(36.75,30.5) ; v1(24.7,14.7) 23.8,13.8 U5.30
  TOP w0.5: S2.14 30.31,46.06 R65.1
  BOTTOM w0.2: S2.14 30.5,44.75 30.5,32.5 32.5,30.5 v1(36.75,30.5) 40.7,30.5 41.75,29.45 41.75,28.5 40,26.75 40,22.75 33.75,16.5 26.5,16.5 v1(24.7,14.7)
485_TX: length 7.3
  TOP w0.6: TH5.1 37.5,53.38 38.25,52.63 R48.1
485_TXD: length 54.9
  TOP w0.2: U13.4 42.41,29.2 v1(42.5,29.1) ; U5.31 23.9,13 25.25,14.35 25.34,14.35 v1(25.7,14.7)
  TOP w0.5: S2.13 30.27,43.52 R67.1
  BOTTOM w0.2: v1(25.7,14.7) 27,16 34,16 40.5,22.5 40.5,26.5 42.5,28.5 v1(42.5,29.1) 42.5,29.8 41.05,31.25 34.05,31.25 33.1,32.2 33.1,42.23 S2.13
I2C_SCL: length 19.7
  TOP w0.2: U5.28 16.65,15.4 TH1.1 14.5,10.75 14.5,8.25 R55.1 13.75,6.75 13.25,6.25 13.25,5.5 13,5.25 U14.6
I2C_SDA: length 22.2
  TOP w0.2: U5.27 16.2,16.2 13,13 11.5,13 10.75,12.25 TH2.1 11.63,12 12.75,10.88 12.75,7.7 12.55,7.5 R56.1 12,7.32 12.1,7.22 U14.5
INT1: length 19
  TOP w0.2: U17.5 40.65,12.9 39.45,11.7 33.2,11.7 v1(32.75,11.25) ; v1(29.25,5.1) R52.1
  BOTTOM w0.2: v1(32.75,11.25) 31.75,11.25 28.98,8.48 28.98,5.37 v1(29.25,5.1)
INT1_M: length 10.7
  TOP w0.2: v1(39.5,15.25) U17.8 ; v1(37,13.25) 37,13.2 36.8,13 U5.10
  BOTTOM w0.2: v1(37,13.25) 37,13.75 38.5,15.25 v1(39.5,15.25)
INT2: length 19.2
  TOP w0.2: R53.1 v1(29.25,3.6) ; v1(32.75,12.25) 33.02,12.52 37.65,12.52 37.85,12.72 U17.4
  BOTTOM w0.2: v1(29.25,3.6) 28.05,4.8 28.05,8.55 31.75,12.25 v1(32.75,12.25)
INT2_M: length 8.2
  TOP w0.2: U17.1 37.3,15.25 37,15.55 37,15.75 36.5,16.25 35,16.25 32.55,13.8 U5.11
LED_GREEN: length 25.8
  TOP w0.2: U5.25 22,17.8 20.5,19.3 20.5,27 21.5,28 21.5,37.5 19.75,39.25 R44.1
LED_RED: length 32.9
  TOP w0.2: U5.26 22,17 20,19 20,27.29 21,28.29 21,37 18,40 13.5,40 12.5,41 R38.1
PLC1: length 10.6
  TOP w0.8: R32.1 39.75,49.79 40.36,50.4 D16.1
  TOP w1: D5.2 D16.1 41.5,51.48 42,51.98 TH4.1
PLC2: length 8.1
  TOP w1: TH3.1 46.25,53.18 45.5,52.43 D15.2 46.35,50.4 47.75,49 D17.1
PLC_RX: length 45.9
  TOP w0.2: 24.2,12.2 24.2,12.6 25.5,13.9 25.9,13.9 v1(26.65,14.65) ; 24.2,12.2 U5.32 ; 24.2,12.2 U5.1 ; v1(40.75,39) R33.1
  TOP w0.3: R33.1 39.75,40.02 39,40.77 Q9.3
  BOTTOM w0.2: v1(40.75,39) 40.75,32.55 43.25,30.05 43.25,28.5 41,26.25 41,22.25 34.25,15.5 27.5,15.5 v1(26.65,14.65)
PLC_TX: length 55.4
  TOP w0.2: R10.2 48,38.57 v1(48.46,39.04) ; v1(27.5,14.5) 26.25,13.25 25.5,13.25 25,12.75 U5.2
  BOTTOM w0.2: v1(48.46,39.04) 48.46,39.54 48.58,39.66 48.58,41.67 46.25,44 44,44 43.25,43.25 43.25,30.95 44,30.2 44,28.5 41.5,26 41.5,22 34.5,15 28,15 v1(27.5,14.5)
RESET: length 14.7
  TOP w0.2: J2.5 25.42,21.58 25.5,21.5 v1(25.5,21) ; R42.1 20.93,14.5 21.03,14.6 v1(21.5,14.6) U5.29
  BOTTOM w0.2: v1(25.5,21) 25.5,20.5 25.6,20.4 25.6,16.6 23.6,14.6 v1(21.5,14.6)
RX_ADC: length 16.3
  TOP w0.2: D1.1 14.85,18.5 15.6,19.25 TP11.1 16.1,19.65 16.12,19.62 18.68,19.62 18.88,19.43 R1.2 C11.2 v1(21,17) ; U5.23 25,18 24.7,17.7 v1(24.7,17.5)
  BOTTOM w0.2: v1(21,17) 23.38,17 23.88,17.5 v1(24.7,17.5)
RX_IN: length 4.8
  TOP w0.2: R15.1 R20.2 TP6.1
  TOP w0.3: TP6.1 J3.2
SCL: length 12.4
  TOP w0.2: U14.3 14.22,5.25 14,5.47 14,6 15.25,7.25 R57.1 16.5,7.63 16.87,8 22,8 22.5,7.5 U16.4
SDA: length 7.7
  TOP w0.2: U14.4 R58.1 16.5,5.12 16.75,4.87 18.54,4.87 18.55,4.88 19.98,4.88 20.6,5.5 U16.6
SELECT: length 23
  TOP w0.2: U5.22 25.8,19.8 25.1,20.5 24.75,20.5 24.25,21 24.25,27.5 25.25,28.5 30.75,28.5 31.81,29.56 S2.9
  TOP w0.5: R75.1 30.39,33.36 S2.9
TX_OUT: length 3.6
  TOP w0.2: C13.1 TP8.1
  TOP w0.3: TP8.1 J3.1
TX_TRIG: length 60.5
  TOP w0.2: R6.1 TP7.1 v1(2.25,43.5) ; U5.9 30.4,12.2 30,12.6 v1(29.5,12.6)
  BOTTOM w0.2: v1(29.5,12.6) 27.65,10.75 10.07,10.75 9.15,11.67 9.15,25.6 3.6,31.15 3.6,42.15 v1(2.25,43.5)
USM_ID4: length 29.1
  TOP w0.2: S2.12 33.3,39.49 33.3,36.6 34,35.9 34,21.75 32.5,20.25 32.5,16.47 32.23,16.2 U5.14
  TOP w0.5: R69.1 31.54,41.25 S2.12
USM_ID5: length 29.8
  TOP w0.2: U5.24 24.2,20.3 23.5,21 23.5,30.75 22.75,31.5 22.75,36.75 23.25,37.25 30.62,37.25 S2.11
  TOP w0.5: R71.1 31,39.25 S2.11
USM_ID6: length 25.1
  TOP w0.2: U5.19 28.2,20.8 26.75,22.25 26.75,27.25 27.25,27.75 31.25,27.75 33.25,29.75 33.25,35.44 32.79,35.9 S2.10
  TOP w0.5: S2.10 31.71,36 R73.1
N00306: length 2.1
  TOP w0.25: U15.3 52.5,19.57
  TOP w0.3: 52.5,19.57 52.88,19.95 C55.1
N00430: length 2.1
  TOP w0.5: R10.1 49.5,38.78 49.55,38.83 Q8.1
N00485: length 3.9
  TOP w0.6: R8.2 R2.2 53,40.08 Q8.2
N00560: length 3.5
  TOP w0.3: U15.1 51.75,17.59
  TOP w0.8: FB1.1 C39.1 51.75,17.59
N00808: length 4.4
  TOP w0.25: 10.78,4.25 10.78,4.25 11.2,4.67 11.2,4.67 11.28,4.75 U14.7 ; 10.78,4.25 R51.1 ; 10.78,4.25 U14.8
  TOP w0.3: C51.1 R51.1
N00882: length 7.4
  TOP w0.6: R31.2 R28.1 47.86,33.75 47.37,34.24 U3.7
N16711905: length 3.4
  TOP w0.3: Q9.1 39.95,43.9 39.75,44.1 R32.2
N16712688: length 16.6
  TOP w0.2: R48.2 R43.1 36.75,45.25 36,44.5 36,39 37,38 40,38 41.13,36.87 U13.6
N16712703: length 15.9
  TOP w0.2: U13.7 39.87,36.88 39.5,37.25 36.75,37.25 35.25,38.75 R45.2 R49.2
N16713814: length 5.3
  TOP w0.2: J2.3 27.96,22.82 29.8,20.98 U5.17
N16714271: length 19.2
  TOP w0.3: Y4.2 41.2,5.65 41.2,9.2 C19.1 41.1,10.4 40.85,10.65 34.8,10.65 34.05,9.9 30.1,9.9 29.8,10.2 U5.8
N16714295: length 13.7
  TOP w0.3: Y4.1 35.7,5.65 C17.1 34.75,9.3 34.6,9.15 29.55,9.15 29,9.7 U5.7
N16714845: length 6.2
  TOP w0.2: U5.16 31.2,21.55 30.5,22.25 J2.1
N16714864: length 11.8
  TOP w0.2: U5.15 30.17,17 30,17.17 30,18 30.68,18.68 30.68,21.07 29.25,22.5 29.25,25 J2.4
N16717763: length 2.5
  TOP w0.2: R54.2 20.05,4 21.05,5 U16.7
N16718046: length 7
  TOP w0.2: U16.9 22,2.5 22.5,2 25.7,2 26.55,2.85 R53.2
N16718070: length 5.9
  TOP w0.2: R52.2 26.5,5.1 25.35,3.95 25.35,3 25.05,2.7 23.2,2.7 23,2.9 U16.11
N16718282: length 4.4
  TOP w0.2: C52.1 21.75,9 23.5,7.25 U16.2
N16724355: length 1.7
  TOP w0.25: R59.1 41.8,13.9 41.45,14.25 U17.6
N16729656: length 1.6
  TOP w0.5: S2.1 25.61,51.14 R60.2
N16729712: length 1.6
  TOP w0.5: R62.2 25.65,48.6 S2.2
N16729754: length 1.6
  TOP w0.5: R64.2 25.69,46.06 S2.3
N16729796: length 1.6
  TOP w0.5: R66.2 25.73,43.52 S2.4
N16732309: length 1.7
  TOP w0.5: S2.5 24.46,41.25 R68.2
N16732331: length 1.9
  TOP w0.5: S2.6 25,39.25 R70.2
N16732335: length 1.6
  TOP w0.5: S2.7 25.65,35.9 R72.2
N16732375: length 1.6
  TOP w0.5: R74.2 25.61,33.36 S2.8
N16777693: length 4
  TOP w0.2: R6.2 R7.2 3.95,39 Q4.1
N16777717: length 13.3
  TOP w0.2: 6,36 3.5,36 3,35.5 Q4.3 ; 6,36 6,39 R3.1 ; 6,36 9.55,36 10.05,35.5 Q7.1 ; 6,36 6,34.83 Q1.1
N16777760: length 7.6
  TOP w0.2: Q1.2 7.95,34.25 8.2,34 11.7,34 11.95,34.25 Q7.2 12.78,34.83 12.95,35 C13.2
N16777979: length 1.5
  TOP w0.2: C7.2 R15.2
N16777981: length 6.5
  TOP w0.2: C7.1 v1(10.25,32) ; R11.1 v1(7.25,32) 7.13,31.89 U2.2
  BOTTOM w0.2: v1(10.25,32) v1(7.25,32)
N16778000: length 9.5
  TOP w0.2: U2.5 4.59,26.75 4.09,27.25 R22.2 R24.2 5.37,28.75 5.87,29.25 U2.3
N16778063: length 8.5
  TOP w0.2: C8.1 6.37,27.25 5.87,26.75 U2.6 5.87,23 R13.1
N16778096: length 6.2
  TOP w0.2: R11.2 8.75,32.09 8.4,31.75 U2.1 8.4,30.25 TP9.1 R16.1
N16778098: length 1.5
  TOP w0.2: C8.2 R16.2
N16778104: length 5.3
  TOP w0.2: C9.2 TP10.1 R13.2 7.13,23 U2.7
N16778216: length 5.9
  TOP w0.2: D1.2 9.4,19.45 8.7,18.75 C9.1 D2.1
N16779077: length 7.9
  TOP w0.2: Q6.3 Q5.3 11.82,45.17 v1(13,44)
  BOTTOM w0.2: D9.2 v1(13,44)
N16779095: length 9.7
  TOP w0.2: Q5.2 11.95,43.5 11.45,44 6.55,44 6.05,43.5 Q6.1 6.05,41 R40.2
N16779267: length 2
  TOP w0.2: Q5.1 10.05,41 R38.2
N16779649: length 7
  TOP w0.2: v1(20.25,45) 20.07,45.17 Q3.3 Q10.3
  BOTTOM w0.2: D18.2 v1(20.25,45)
N16779651: length 9.7
  TOP w0.2: Q3.2 19.95,43.5 19.45,44 14.55,44 14.05,43.5 Q10.1 14.05,41 R46.2
N16779692: length 2
  TOP w0.2: R44.2 18.05,41 Q3.1
N16779821: length 6.6
  TOP w0.5: R41.1 47.75,39.75 v1(47.25,39.25)
  BOTTOM w0.5: D14.1 46.48,42.55 47.25,41.78 v1(47.25,39.25)
N16779835: length 27.9
  BOTTOM w0.2: D10.1 42.55,13.35 43.32,14.12 43.32,21.02 45.52,23.22 45.52,38.93 D14.2
N16779837: length 27.9
  BOTTOM w0.2: D19.1 19.3,15.45 21,13.75 33.25,13.75 34.5,12.5 38.1,12.5 38.6,13 D10.2
N16779852: length 27.5
  BOTTOM w0.2: D18.1 15.45,32.8 15.15,32.5 15.15,23.4 13,21.25 D19.2
N16779961: length 6.4
  TOP w0.6: v1(41.5,43) 42.25,42.25 R37.1
  BOTTOM w0.6: D6.1 39.45,43.47 39.92,43 v1(41.5,43)
N16779980: length 34.5
  BOTTOM w0.2: D6.2 46.5,45 49.5,42 49.5,39 48.75,38.25 47,38.25 46.25,37.5 46.25,22 45,20.75 D7.1
N16779982: length 31.1
  BOTTOM w0.2: D8.1 19.4,13 19.65,13.25 32.75,13.25 34.75,11.25 44.25,11.25 45,12 D7.2
N16779984: length 31.4
  BOTTOM w0.2: D9.1 13,24.1 10.8,21.9 10.8,14.1 11.7,13.2 14.27,13.2 14.47,13 D8.2
N167777270: length 2.1
  TOP w0.2: Q7.3 11,37.85 11.75,38.6 R25.1

## Copper pours and planes (outline as drawn; the poured copper is in the pictures)
GND on TOP: 7.21,0.5 0.5,7.21 0.5,50.79 7.21,57.5 50.79,57.5 57.5,50.79 57.5,7.21 50.79,0.5 ; 23 cut-outs
GND on BOTTOM: 7.21,0.5 0.5,7.21 0.5,50.79 7.21,57.5 50.79,57.5 57.5,50.79 57.5,7.21 50.79,0.5 ; 20 cut-outs

## Text on the board
Ref Des/Silkscreen Bottom: RESET | GND | MOSI | SCK | VCC | MISO
Ref Des/Silkscreen Top: GND | SDA | SCL | 485Rx | 485Tx | PLC1 | A5.5V | PLC2 | D3V3 | D4.9V | REV.P2 | USM BOARD
User.19: FIGURE | SIZE | 0.30 | 0.40 | 0.80 | 0.90 | 0.99 | 1.00 | 1.30 | 3.20 | DRILL CHART: TOP to BOTTOM | ALL UNITS ARE IN MILLIMETERS | PLATED | QTY | 296 | 5 | 3 | 7 | 6 | 16 | 4
